# Altium PCB Pannel3.5x3.PcbDoc (part 2 of 4)
Units mil, origin at the board's own origin, x right, y up, seen from the top; angles counter-clockwise.
Board outline 3543.31 x 2771.65 mil, 4 copper layers (SIGNAL, GROUND, PWR, SIGNAL (Bottom)), stack 61.627 mil thick; 248 components, 189 nets, 921 pads, 651 vias.
Unrouted connection lines stored in the file: 1.
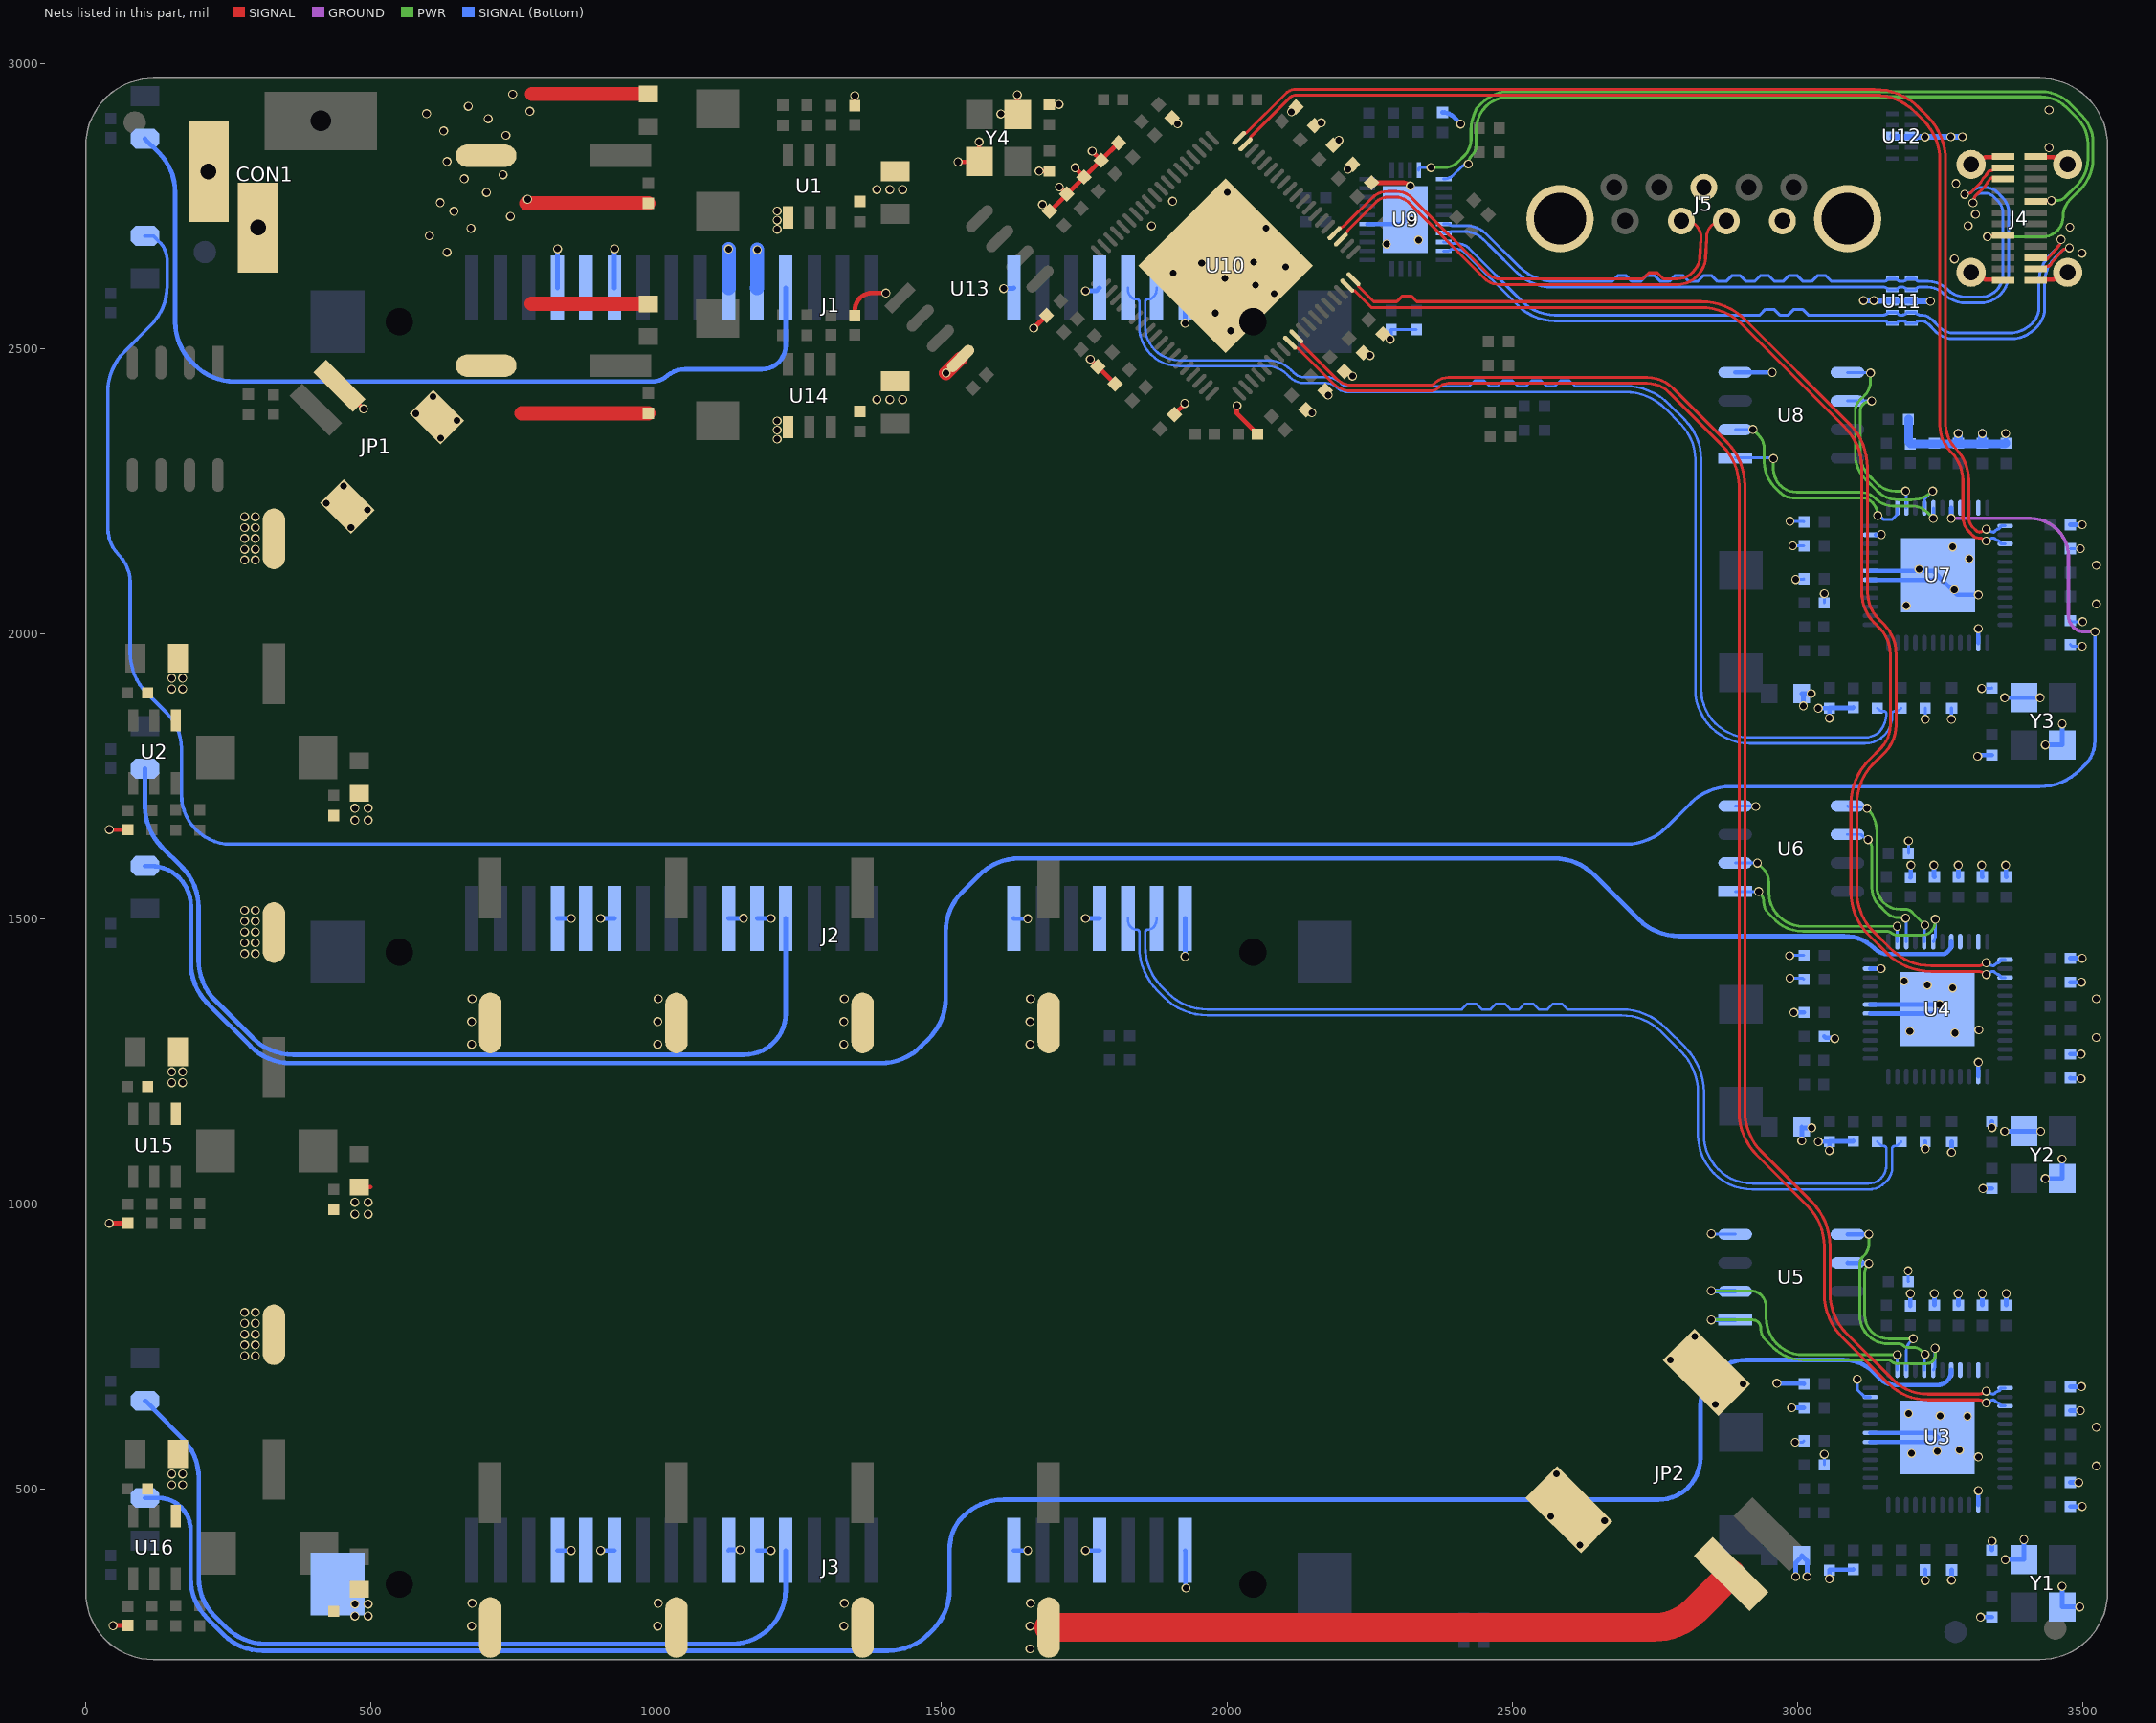
[diagram p4: the nets of this part, all layers, seen from the top]

## Via types
v1: diameter 15.75, hole 11.81, SIGNAL to SIGNAL (Bottom), tented both sides, 651 vias

## Nets (pads, with @x,y where several pads share a name; then routed paths per layer and width w, separated by ;. In a path a pad name is that pad's centre, name@x,y a point inside that pad or via, vN(x,y) a via of type N, cw(c..) or ccw(c..) an arc to the next point about the centre after c; other vN are vias at no path point) (continued)
cap_TX2_N: C22.1 J2.S3 | length 1723.4
  SIGNAL (Bottom) w4.29: J2.S3@1826.82,1500.84 1826.82,1498.42 ccw(c1845.58,1498.42) 1832.31,1485.15 ccw(c1842.38,1495.22) 1842.38,1480.98 cw(c1842.38,1476.69) 1845.42,1479.73 cw(c1842.38,1476.69) 1846.67,1476.69 1846.67,1451.41 ccw(c1956.85,1451.41) 1878.9,1373.55 ccw(c1956.85,1451.41) 1878.94,1373.5 1889.77,1362.67 ccw(c1966.24,1439.14) 1889.89,1362.56 ccw(c1966.24,1439.14) 1966.09,1331 ccw(c1966.24,1439.14) 1966.24,1331 2691.02,1331 cw(c2691.02,1231) 2761.73,1301.71 2796.57,1266.86 cw(c2725.86,1196.15) 2825.86,1196.15 2825.86,1121.5 ccw(c2921.53,1121.5) 2853.88,1053.86 2853.99,1053.75 ccw(c2921.65,1121.41) 2854.1,1053.64 ccw(c2921.65,1121.41) 2921.51,1025.72 ccw(c2921.65,1121.41) 2921.65,1025.72 3124.26,1025.72 ccw(c3124.26,1067.47) 3153.79,1037.95 3156.87,1041.03 ccw(c3134.46,1063.43) 3166.15,1063.43 3166.15,1097.58 cw(c3170.44,1097.58) 3167.4,1100.61 cw(c3170.44,1097.58) 3170.44,1101.87 3171.48,1101.87 ccw(c3171.48,1108.68) 3176.29,1103.86 C22.1@3182,1109.57
cap_TX2_P: C19.1 J2.S2 | length 1723.7
  SIGNAL (Bottom) w4.29: J2.S2@1876.82,1500.84 1876.82,1498.42 cw(c1858.06,1498.42) 1871.32,1485.15 cw(c1861.25,1495.22) 1861.25,1480.98 ccw(c1861.25,1476.69) 1858.22,1479.73 ccw(c1861.25,1476.69) 1856.96,1476.69 1856.96,1451.46 ccw(c1956.96,1451.46) 1886.25,1380.75 1897,1370 ccw(c1966.31,1439.31) 1966.31,1341.29 2388,1341.29 2412,1341.29 2422,1351.29 2437,1351.29 2447,1341.29 2462,1341.29 2472,1351.29 2487,1351.29 2497,1341.29 2512,1341.29 2522,1351.29 2537,1351.29 2547,1341.29 2562,1341.29 2572,1351.29 2587,1351.29 2597,1341.29 2612,1341.29 2691.06,1341.29 cw(c2691.06,1231.11) 2768.95,1309.04 ; 2768.97,1309.02 2803.88,1274.11 cw(c2725.97,1196.2) 2836.15,1196.2 2836.15,1121.58 ccw(c2921.72,1121.58) 2861.21,1061.08 ccw(c2921.72,1121.58) 2861.25,1061.04 ccw(c2921.72,1121.58) 2921.72,1036.01 3124.17,1036.01 ccw(c3124.17,1067.7) 3146.58,1045.29 ccw(c3124.17,1067.7) 3155.86,1067.7 3155.86,1097.58 ccw(c3151.56,1097.58) 3154.6,1100.61 ccw(c3151.57,1097.58) 3151.57,1101.87 3150.52,1101.87 cw(c3150.52,1108.68) 3145.71,1103.86 C19.1@3140,1109.57
cap_TX3_N: C21.1 J1.S3 | length 2021.5
  SIGNAL (Bottom) w4.29: J1.S3@1826.82,2606.09 1826.82,2602.74 ccw(c1843.32,2602.74) 1831.65,2591.07 1833.77,2588.95 ccw(c1840.32,2595.5) 1840.32,2586.24 1842.38,2586.24 cw(c1842.38,2581.95) 1845.42,2584.98 cw(c1842.38,2581.95) 1846.67,2581.95 1846.67,2538.55 ccw(c1916.14,2538.55) 1867,2489.45 1867.12,2489.33 ccw(c1916.19,2538.39) 1867.16,2489.28 ccw(c1916.19,2538.39) 1916.19,2469 2070.24,2469 cw(c2070.24,2418.37) 2106.04,2454.17 2110.15,2450.06 ; 2110.18,2450.03 ccw(c2136.02,2475.93) 2136.02,2439.34 2173.89,2439.34 cw(c2173.89,2412.66) 2192.75,2431.52 ; 2192.75,2431.53 ccw(c2211.62,2450.39) 2211.62,2423.71 2697.87,2423.71 cw(c2697.87,2323.71) 2768.58,2394.42 2794.79,2368.21 cw(c2731.51,2304.93) 2821,2304.93 2821,1902.78 ccw(c2915.96,1902.78) 2848.8,1835.65 2848.92,1835.52 ; 2848.94,1835.51 ccw(c2916.07,1902.67) 2916.07,1807.71 3118.35,1807.71 ccw(c3118.35,1855.43) 3152.09,1821.69 ccw(c3118.17,1855.61) 3166.15,1855.61 3166.15,1859.67 cw(c3170.44,1859.67) 3167.4,1862.7 cw(c3170.44,1859.67) 3170.44,1863.96 3172.53,1863.96 ccw(c3172.53,1873.3) C21.1@3179.12,1866.69 ; C21.1@3179.13,1866.69 C21.1@3182,1869.57
cap_TX3_P: C18.1 J1.S2 | length 2024.2
  SIGNAL (Bottom) w4.29: J1.S2@1876.82,2606.09 1876.82,2602.74 cw(c1860.32,2602.74) 1871.98,2591.07 1869.87,2588.95 cw(c1863.31,2595.5) 1863.31,2586.24 1861.25,2586.24 ccw(c1861.25,2581.95) 1858.22,2584.98 ccw(c1861.25,2581.95) 1856.96,2581.95 1856.96,2538.61 ccw(c1916.28,2538.61) 1874.34,2496.66 ccw(c1916.28,2538.61) 1916.28,2479.29 2070.38,2479.29 cw(c2070.38,2418.72) 2113.21,2461.55 2117.34,2457.42 ccw(c2136.15,2476.23) 2117.41,2457.35 ccw(c2136.15,2476.23) 2136.07,2449.63 ccw(c2136.15,2476.23) 2136.15,2449.63 2174,2449.63 cw(c2174,2412.93) 2199.95,2438.88 ; 2199.96,2438.87 ccw(c2211.73,2450.67) 2211.73,2434 2388,2434 2425,2434 2435,2444 2450,2444 2460,2434 2475,2434 2485,2444 2500,2444 2510,2434 2525,2434 2535,2444 2550,2444 2560,2434 2575,2434 2585,2444 2600,2444 2610,2434 2625,2434 2697.91,2434 cw(c2697.91,2323.82) 2775.8,2401.75 2802.19,2375.36 cw(c2731.95,2305.12) 2831.29,2305.12 2831.29,1902.86 ccw(c2916.15,1902.86) 2856.15,1842.86 ccw(c2916.15,1902.86) 2916.15,1818 3118.3,1818 ccw(c3118.3,1855.56) 3143.45,1827.67 ; C18.1@3140,1869.57 C18.1@3142.87,1866.69 ; 3141.84,1825.99 3141.95,1826.09 ccw(c3108.37,1859.67) 3143.45,1827.67 ; C18.1@3142.88,1866.69 ccw(c3149.47,1873.3) 3149.47,1863.96 3151.57,1863.96 cw(c3151.57,1859.67) 3154.6,1862.7 cw(c3151.56,1859.67) 3155.86,1859.67 cw(c3108.37,1859.67) 3155.83,1858.06 cw(c3108.37,1859.67) 3143.45,1827.67
DAS1: J3.P11
DAS2: J2.P11
DAS3: J1.P11
GND: C1.2 C2.2 C5.1 C6.1 C7.1 C8.1 C11.2 C13.2 C15.2 C16.2 C30.1 C31.1 C32.1 C33.1 C34.1 C35.1 C38.1 C39.1 C40.1 C41.1 C42.1 C43.1 C44.1 C45.1 C46.1 C47.1 C48.1 C49.1 C50.1 C51.1 C52.1 C53.1 C54.1 C55.1 C56.1 C57.1 C58.1 C59.1 C60.1 C61.1 C62.1 C63.1 C64.1 C65.1 C70.2 C71.2 C72.2 C73.2 C74.1 C75.1 C76.1 C78.1 C79.1 C80.1 C81.1 C82.1 C83.1 C84.1 C85.1 C86.1 C87.1 C88.1 C89.1 C90.1 C91.1 C94.2 C95.2 C96.1 C97.2 C108.2 C109.2 C110.1 C111.1 C112.1 C113.1 C114.1 C115.1 C116.1 C117.1 C118.1 C119.1 C120.1 C121.1 C122.1 C123.1 C124.1 C125.1 C126.1 C129.1 C130.1 C131.1 C132.1 C135.2 C137.2 C139.2 C141.1 C142.1 C144.2 CON1.2 CON1.3 E1.2 E2.2 E3.2 E4.2 E5.2 E6.2 E7.2 E8.2 E9.2 E10.2 E11.2 E12.2 E13.2 J1.P5 J1.P6 J1.P10 J1.P12 J1.S1 J1.S4 J1.S7 J2.P5 J2.P6 J2.P10 J2.P12 J2.S1 J2.S4 J2.S7 J3.P5 J3.P6 J3.P10 J3.P12 J3.S1 J3.S4 J3.S7 J3.SH2 J4.A1 J4.A12 J4.B1 J4.B12 J4.SH1 J4.SH2 J4.SH3 J4.SH4 J5.4 J5.7 J5.10 J5.11 JP1.0 JP1.2 JP2.0 JP2.2 R3.2 R4.2 R7.2 R9.2 R12.2 R30.1 R31.1 R32.1 R33.1 R36.1 R37.1 R44.2 R46.1 R47.1 R49.2 R53.2 U1.1 U2.1 U3.26 U3.42 U3.43 U3.47 U3.49 U4.26 U4.42 U4.43 U4.47 U4.49 U5.4 U6.4 U7.26 U7.42 U7.43 U7.47 U7.49 U8.4 U9.19 U9.29 U10.77 U11.3 U11.8 U12.3 U12.8 U13.4 U14.1 U15.1 U16.1 Y1.2 Y1.4 Y2.2 Y2.4 Y3.2 Y3.4 Y4.2 Y4.4 | length 7748.5
  SIGNAL w8: v1(41.46,966.54) R9.2@74,966.54 ; v1(41.54,1656.54) R4.2@74,1656.54 ; v1(48,261) 48.27,261.27 73.73,261.27 R12.2@74,261.54 ; JP1.2@445.13,2434.63 446.37,2434.63 v1(487,2394) ; C137.2@480,1030 498.94,1030 ; R7.2@1348,2557.46 1348,2566.72 cw(c1378.39,2566.72) 1356.9,2588.21 ; R3.2@1348,2925.46 v1(1348,2943.05) ; 1356.93,2588.23 cw(c1378.39,2566.72) 1378.39,2597.11 v1(1402.5,2597.11) ; v1(1529,2827) 1565.87,2827 Y4.2@1566.54,2827.66 1566,2828.2 v1(1566,2862) ; v1(1604.03,2911) 1632.8,2911 Y4.4@1632.89,2910.92 ; v1(1632.89,2944.67) Y4.4@1632.89,2910.92 ; Y4.4@1633.46,2910.34 Y4.4@1632.89,2910.92 ; v1(1661.48,2535.59) v1(1661.48,2535.59) C112.1@1683.95,2557.95 C112.1@1683.95,2557.95 ; v1(1670.96,2811) C109.2@1689,2811 ; v1(1676.8,2752.18) 1677.31,2752.18 1688.96,2740.53 C116.1@1689.47,2740.53 ccw(c1689.47,2742.94) 1691.18,2741.24 C125.1@1749.97,2800.03 ; C108.2@1689,2927.72 v1(1705.9,2927.72) ccw(c1705.9,2932.1) v1@1709,2929 ; v1(1706.48,2783.05) 1706.72,2783.05 1719.24,2770.53 C115.1@1719.47,2770.53 ; v1(1734.23,2816.61) 1734.23,2816.19 1749.46,2800.96 1749.46,2800.03 C125.1@1749.97,2800.03 ; v1(1760.72,2481.17) C120.1@1773.95,2467.95 C97.2@1803.95,2437.95 ; v1(1764.03,2845.8) 1764.11,2845.8 1779.88,2830.03 R49.2@1779.97,2830.03 ; C114.1@1810.47,2860.53 R49.2@1779.97,2830.03 ; R53.2@1903.83,2904.17 v1(1914,2894) ; C110.1@1908,2384 1908,2384.75 1926.25,2403 v1(1926.25,2403.75) ; v1(2017.72,2399.71) 2017.72,2386.01 R44.2@2053.73,2350 ; v1(2113.49,2914.99) 2113.49,2915.24 2121.53,2923.28 C118.1@2121.53,2923.53 ; C121.1@2138.53,2392.47 2141.88,2392.47 2146.93,2387.43 v1(2149.02,2387.43) ; C119.1@2153.53,2890.53 2158.37,2890.53 2163.42,2895.57 v1(2165.52,2895.57) ; C126.1@2172.53,2426.47 2172.53,2423.3 v1(2177.56,2418.26) ; C123.1@2186.53,2856.53 2187.16,2856.53 2195.67,2865.04 v1(2196.31,2865.04) ; C117.1@2205.53,2459.47 2210.25,2459.47 2218.3,2451.42 v1(2220.4,2451.42) ; v1@2212.24,2813.24 v1(2212.24,2814.24) C122.1@2220.53,2822.53 ; C124.1@2239.53,2492.47 2243.88,2492.47 2248.92,2487.43 v1(2251.02,2487.43) ; C113.1@2253.53,2790.53 2308.33,2790.53 cw(c2308.33,2771.54) 2315.51,2789.12 cw(c2308.33,2771.54) v1(2321.76,2784.97) ; J4.SH2@3304.36,2633.51 3316.04,2633.51 3328.97,2620.58 3359.81,2620.58 J4.B1@3360.66,2619.73 ; J4.SH1@3304.36,2822.49 3316.04,2822.49 3328.97,2835.42 3359.81,2835.42 J4.B12@3360.66,2836.27 ; J4.A12@3417.35,2619.73 3418.19,2620.58 3449.03,2620.58 3461.96,2633.51 J4.SH3@3473.65,2633.51 ; J4.A1@3417.35,2836.27 3418.19,2835.42 3449.03,2835.42 3461.96,2822.49 J4.SH4@3473.65,2822.49 ; C125.1@1749.97,2800.03 R49.2@1779.97,2830.03
  SIGNAL w25: 763.72,2386.28 C15.2@986,2386.28 ; v1@772.28,2754.28 C1.2@986,2754.28 ; 781.46,2578.09 C135.2@986,2578.09 ; 782.09,2946.09 C11.2@986,2946.09 ; v1(1508,2456.93) U13.4@1533.44,2482.37
  SIGNAL w50: E5.2@1688,257.89 2748.8,257.89 ccw(c2748.8,357.89) 2819.51,287.18 JP2.2@2883.87,351.54
  SIGNAL (Bottom) w5: U6.4@2890.97,1698 2891.47,1697.5 2926.5,1697.5 v1(2927,1697) ; v1(2986.41,1435.48) 2986.93,1436 C62.1@3011.57,1436 ; v1(2987,1396) 3009.57,1396 C60.1@3011.57,1394
  SIGNAL (Bottom) w5.1: v1(2286.12,2516.05) ccw(c2281.58,2520.59) 2288,2520.59 R46.1@2288,2533.27 R47.1@2332,2533.27 ; v1(2849,948) 2849.5,947.5 2890.47,947.5 U5.4@2890.97,947 ; v1(2987,2197) 3010.57,2197 C89.1@3011.57,2196 ; v1(2992,2154) C86.1@3011.57,2154 ; v1(2996.24,582.67) 3009.24,582.67 C43.1@3011.57,585 ; v1(2997,2095) 3010.57,2095 C85.1@3011.57,2096 ; C30.1@3047,543 v1(3047,561.28) ; C74.1@3047,2054 v1(3047,2070) ; v1(3105,693) 3105,674.91 3118.05,661.87 U3.47@3127.89,661.87 ; v1(3194,883) 3194,864.72 C58.1@3194.72,864 ; C63.1@3194.72,1615 v1(3194.72,1636.72) ; v1(3224,1850) C78.1@3224,1869.57 ; v1(3270,1850) 3270,1869.34 C83.1@3270.22,1869.57 ; v1(3323,1904) 3340.28,1904 C94.2@3341,1904.72 ; C81.1@3478.27,1981 3481.27,1978 v1(3499,1978) ; C84.1@3478.27,2023 3480.27,2021 v1(3500,2021) ; C82.1@3478.27,2149 v1(3496,2149)
  SIGNAL (Bottom) w8: J3.P12@826.82,392.86 v1(851.13,392.86) ; J2.P12@826.82,1500.84 v1(851.13,1500.84) ; J1.P12@826.82,2606.09 826.82,2674.11 v1(827.23,2674.52) ; v1(902.5,392.86) J3.P10@926.82,392.86 ; v1(902.5,1500.84) J2.P10@926.82,1500.84 ; J1.P10@926.82,2606.09 926.82,2674.11 v1(927.23,2674.52) ; J3.P6@1126.82,392.86 1127.96,394 v1(1147,394) ; J2.P6@1126.82,1500.84 1126.98,1501 v1(1153,1501) ; J3.P5@1176.82,392.86 v1(1201.13,392.86) ; J2.P5@1176.82,1500.84 v1(1201.13,1500.84) ; v1(1609,2605) 1625.72,2605 J1.S7@1626.82,2606.09 ; J3.S7@1626.82,392.86 v1(1651.13,392.86) ; J2.S7@1626.82,1500.84 1627.41,1500.25 v1(1651.13,1500.25) ; v1(1752.5,392.86) J3.S4@1776.82,392.86 ; v1(1752.5,1500.84) J2.S4@1776.82,1500.84 ; v1(1752.5,2600.85) 1771.58,2600.85 J1.S4@1776.82,2606.09 ; J3.S1@1926.82,392.86 1927.64,392.03 1927.64,327.69 v1(1928.47,326.86) ; v1(1926.82,1434.18) J2.S1@1926.82,1500.84 ; v1(1926.82,2544.18) J1.S1@1926.82,2606.09 ; U9.19@2246.07,2718.13 2305.13,2718.13 U9.29@2313,2726 ; C96.1@2378,2913.84 cw(c2378,2886.11) 2393.27,2909.26 cw(c2378,2886.11) 2397.61,2905.72 v1(2409.86,2893.48) ; U8.4@2890.97,2458 v1(2956,2458) ; v1(2964,686) 2964.5,685.5 3011.07,685.5 C56.1@3011.57,685 ; v1(2990,643) C54.1@3011.57,643 ; v1(2994,1336) C51.1@3011.57,1336 ; v1(2997,347) 2997,371.27 C32.1@3005.82,380.09 ; C32.1@3007.54,384 3017,374.54 v1(3017,347) ; C34.1@3007.54,1135 C34.1@3007.71,1134.84 ; v1(3007.71,1110.97) C34.1@3007.71,1134.84 ; v1(3010.42,1873.46) 3010.42,1892.12 C75.1@3007.54,1895 v1(3024.23,1895) ; v1@3027.71,1133.71 v1(3024.93,1133.71) 3008.84,1133.71 C34.1@3007.71,1134.84 ; v1(3036.57,1109.57) C35.1@3056,1109.57 ; v1(3036.81,1869.07) 3037.06,1869.32 3055.75,1869.32 C76.1@3056,1869.57 ; C31.1@3047,1294 3049.52,1291.48 3064.08,1291.48 v1(3065.57,1290) ; v1(3056,343) C33.1@3056,358.28 3056.7,358.98 3097.3,358.98 R32.1@3098,359.68 ; v1(3056,1094) C35.1@3056,1109.57 ; v1(3056,1852) C76.1@3056,1869.57 ; R33.1@3098,1110.68 3097.44,1110.12 3056.56,1110.12 C35.1@3056,1109.57 ; R37.1@3098,1870.68 3096.89,1869.57 C76.1@3056,1869.57 ; U3.42@3127.89,583.13 3238.13,583.13 U3.49@3246,591 3238.13,598.87 U3.43@3127.89,598.87 ; U4.42@3127.89,1334.13 3238.13,1334.13 U4.49@3246,1342 3238.13,1349.87 U4.43@3127.89,1349.87 ; U4.47@3127.89,1412.87 3127.95,1412.8 3146.27,1412.8 v1(3146.38,1412.69) ; U7.42@3127.89,2094.13 3238.13,2094.13 U7.49@3246,2102 ; U7.43@3127.89,2109.87 3238.13,2109.87 U7.49@3246,2102 ; U7.47@3137.78,2173.31 3146.61,2173.31 v1(3147.06,2173.75) ; R30.1@3198,821.61 v1(3198,843) ; R31.1@3198,1572.61 3198.5,1573.11 3198.5,1593.5 v1(3199,1594) ; v1(3224,340) C42.1@3224,358.57 ; v1(3224,1097) C48.1@3224,1109.57 ; v1(3239,1594) 3239.5,1593.5 3239.5,1574.22 C53.1@3240,1573.72 ; C45.1@3240,822.72 v1(3240,843) ; v1(3270.22,340.78) C41.1@3270.22,358.57 ; v1(3270.22,1090.78) C49.1@3270.22,1109.57 ; C59.1@3282,822.72 v1(3282,843) ; C65.1@3282,1573.72 v1(3282,1594) ; v1(3316,1785) cw(c3321.51,1779.49) 3321.51,1787.28 C95.2@3341,1787.28 ; U7.26@3316.87,1983.89 3316.93,1983.95 3316.93,2008.56 v1(3317.05,2008.68) ; U3.26@3316.93,472.95 v1@3316.93,497.56 ; U4.26@3316.93,1223.95 v1@3316.93,1248.56 ; v1(3317,2068) 3280,2068 U7.49@3246,2102 ; v1(3321,276) 3321.14,276.14 3340.86,276.14 C71.2@3341,276.28 ; v1(3323,1594) 3323.5,1593.5 3323.5,1574.22 C50.1@3324,1573.72 ; C40.1@3324,822.72 v1(3324,843) ; v1(3325.28,1027.28) C73.2@3341,1027.28 ; C70.2@3341,393.72 v1(3341,409) ; v1(3341,1134) C72.2@3341,1144.72 ; v1(3363.32,1127.68) Y2.4@3397,1127.68 v1(3426.43,1127.68) ; v1(3363.32,1887.68) Y3.4@3397,1887.68 v1(3425.32,1887.68) ; v1(3364.32,376.68) Y1.4@3397,376.68 v1(3397,412) ; v1(3365,1594) 3365.5,1593.5 3365.5,1574.22 C61.1@3366,1573.72 ; v1(3365,2351) 3365.5,2350.5 C87.1@3365.5,2334.22 ; C55.1@3366,822.72 v1(3366,843) ; v1@3429.52,1043.52 3433.01,1043.52 v1(3434.5,1045) Y2.2@3463.93,1045 v1(3463.93,1079.07) ; v1@3433,1805 v1(3434.5,1805) Y3.2@3463.93,1805 3464.02,1805.09 v1(3464.02,1842) ; v1(3463.93,330.07) Y1.2@3463.93,294 v1(3495,294) ; C39.1@3478.27,470 v1(3499,470) ; C38.1@3478.27,512 v1(3493,512) ; C44.1@3478.27,638 v1(3496,638) ; C57.1@3478.27,680 v1(3498,680) ; C47.1@3478.27,1221 3478.77,1220.5 3496.5,1220.5 v1(3497,1220) ; C46.1@3478.27,1263 v1(3497,1263) ; C52.1@3478.27,1389 v1(3498,1389) ; C64.1@3478.27,1431 v1(3499,1431) ; C88.1@3478.27,2191 v1(3499,2191)
  SIGNAL (Bottom) w10: v1(3116,2584) v1(3134,2584) 3134.5,2583.5 3166.06,2583.5 U11.8@3166.56,2583 U11.3@3199.44,2583 3199.53,2582.9 3233,2582.9 v1(3233.1,2582.81) ; U12.8@3166.56,2872 3167.19,2871.37 3222.91,2871.37 v1(3223.54,2870.75) 3223.67,2870.87 3268.87,2870.87 v1(3269,2871) v1(3289,2871)
  SIGNAL (Bottom) w15: C90.1@3194.72,2376 3194.72,2340.53 ccw(c3205.93,2340.53) R36.1@3198,2332.61 3361.61,2332.61 ccw(c3361.61,2338.11) C87.1@3365.5,2334.22 ; C91.1@3282,2333.72 v1(3282,2351) ; C80.1@3324,2333.72 v1(3324,2351)
  SIGNAL (Bottom) w25: J1.P6@1126.82,2606.09 v1(1126.82,2674.18) ; J1.P5@1176.82,2606.09 1177,2606.28 v1(1177,2673)
  other v1: 1655,220.33 676.41,260.33 1002.61,260.33 1328.8,260.33 1655,260.33 472,278 495,278 472,299 495,299 677.41,300.33 1003.61,300.33 1329.8,300.33 1656,300.33 2619,402 2662,445 2568,453 3317.05,497.68 151,508 170,508 151,527 170,527 2578,527 3524,541 3317,557 3200,563 3245.1,566.95 3284,569 3524,609 3298,628 3250,629 3195,633 2856,649 2905,685 2777,727 278.55,733.99 297.55,733.99 278.55,752.99 297.55,752.99 2820,768 278.55,771.99 297.55,771.99 278.55,790.99 297.55,790.99 278.55,809.99 297.55,809.99 472,982.28 495,982.28 472,1003.28 495,1003.28 151,1213 170,1213 151,1232 170,1232 3317.05,1248.68 676.41,1280 1002.61,1280 1328.8,1280 1655,1280 3524,1292 3276,1300 3197,1303 3317.97,1305.53 676.41,1320 1002.61,1320 1328.8,1320 1655,1320 3249,1350 677.41,1360 1003.61,1360 1329.8,1360 1656,1360 3524,1360 3272,1379 3228,1384 3187,1391 278.55,1438.99 297.55,1438.99 278.55,1457.99 297.55,1457.99 278.55,1476.99 297.55,1476.99 278.55,1495.99 297.55,1495.99 278.55,1514.99 297.55,1514.99 472,1673 495,1673 472,1694 495,1694 151,1903 170,1903 151,1922 170,1922 3191,2049 3524,2052 3275,2077 3213,2113 3524,2120 278.55,2128.99 297.55,2128.99 3301.17,2131.07 278.55,2147.99 297.55,2147.99 3272,2152 278.55,2166.99 297.55,2166.99 278.55,2185.99 297.55,2185.99 465,2186 278.55,2204.99 297.55,2204.99 494,2217 422,2229 452,2259 1212,2341 621.9,2342.9 1212,2357 1212,2373 650.9,2373.9 578.9,2385.9 1386.91,2410.4 1409.31,2410.4 1431.84,2410.4 608.9,2415.9 2007,2531 1980,2562 2083,2596 2050,2611 1997,2623 1906,2632 2103,2643 1956,2650 2047,2651.63 3275.09,2657 3498.81,2667 633.45,2668.55 2280,2683 2336,2690 602.45,2697.55 1212,2709 675.45,2710.55 2069,2711 3477.51,2712.55 1867.95,2714.87 3299,2715 2324,2724 1212,2725 744.55,2731.55 3312.21,2735.08 645.45,2740.55 1212,2741 621.45,2755.55 1905.04,2758.01 774.55,2761.55 702.55,2773.55 2001,2774 1386.91,2778.4 1409.31,2778.4 1431.84,2778.4 3278,2789 663.45,2797.55 731.55,2804.55 633.45,2827.55 3441,2852 736.45,2873.55 627.55,2881.45 705.45,2902.55 597.55,2911.45 778.45,2915.55 3441,2918 670.55,2924.45 748.45,2945.55
GPIO0-A: U3.2 U5.2 | length 467.6
  PWR w5: v1(2849,848) 2917.69,848 cw(c2917.69,820.69) 2936.99,840.01 cw(c2917.69,820.69) 2945,820.69 2945,801 ccw(c3010.19,801) 2964.09,754.91 ccw(c3010.19,801) 3010.19,735.81 v1(3174.95,735.81)
  SIGNAL (Bottom) w5: v1(3174.95,735.81) 3174.95,709.3 U3.2@3175.13,709.11
  SIGNAL (Bottom) w8: v1(2849,848) 2849.5,847.5 2890.47,847.5 U5.2@2890.97,847
GPIO0-B: U4.2 U6.2 | length 383
  PWR w5: v1(2930,1598) 2940,1588 cw(c2915.86,1563.86) 2950,1563.86 2950,1546.75 ccw(c3009.75,1546.75) 2967.47,1504.53 ; 2967.53,1504.47 ccw(c3009.75,1546.75) 3009.75,1487 v1(3174.76,1487)
  SIGNAL (Bottom) w5: U6.2@2890.97,1598 v1(2930,1598) ; v1(3174.76,1487) 3174.95,1486.81 3174.95,1460.3 U4.2@3175.13,1460.11
GPIO0-C: U7.2 U8.2 | length 400.9
  PWR w5: v1(2922,2358) 2932,2348 cw(c2907.86,2323.86) 2942,2323.86 2942,2301.16 ccw(c3005.16,2301.16) 2960.5,2256.5 2969.75,2247.25 ccw(c2992.08,2269.58) 2992.08,2238 3112.31,2238 cw(c3112.31,2211.54) 3131.02,2230.25 3131.41,2229.87 cw(c3108.67,2207.13) 3138.77,2218.43 cw(c3108.67,2207.13) v1(3140.83,2207.13)
  SIGNAL (Bottom) w5: U8.2@2890.97,2358 v1(2922,2358) ; v1(3140.83,2207.13) 3143.73,2207.13 3151.03,2199.83 3165.47,2199.83 3175.13,2209.49 U7.2@3175.13,2220.11
GPIO1-A: U3.3 U5.6 | length 297.8
  PWR w5: v1(3125,896) ccw(c3141.9,879.1) 3121,890.7 ccw(c3141.9,879.1) 3118,879.1 3118,805.58 ccw(c3159.58,805.58) 3130.18,776.18 ccw(c3159.58,805.58) 3159.58,764 v1(3203.14,764)
  SIGNAL (Bottom) w5: U3.3@3190.88,709.11 3190.88,743.08 cw(c3211.8,743.08) 3197.01,757.87 v1(3203.14,764)
  SIGNAL (Bottom) w8: U5.6@3087.82,897 3088.32,896.5 3124.5,896.5 v1(3125,896)
GPIO1-B: U4.3 U6.6 | length 256.5
  PWR w5: v1(3124,1639) cw(c3108.61,1623.61) 3128.4,1632.67 cw(c3108.61,1623.61) 3130.37,1623.61 3130.37,1554.82 ccw(c3174.3,1554.82) 3143.24,1523.76 3156.11,1510.89 ; 3156.13,1510.87 ccw(c3176.67,1531.46) 3176.67,1502.37 3188.72,1502.37 v1(3189.76,1501.34)
  SIGNAL (Bottom) w5: U6.6@3087.82,1648 3111.48,1648 3118.42,1641.06 3121.94,1641.06 v1(3124,1639) ; v1(3189.76,1501.34) 3190.88,1500.21 U4.3@3190.88,1460.11
GPIO1-C: U7.3 U8.6 | length 292.9
  PWR w5: 3115.02,2402.03 ccw(c3126.13,2390.92) 3110.42,2390.92 3110.42,2312.97 ccw(c3160.3,2312.97) 3125.01,2277.72 ; 3115.03,2402.04 cw(c3129.42,2387.63) 3122.1,2406.64 cw(c3129.42,2387.63) 3129.42,2408 v1(3130,2408) ; 3125.03,2277.7 3139.64,2263.09 ccw(c3171.24,2294.7) 3171.24,2250 v1(3189.76,2250)
  SIGNAL (Bottom) w5: U8.6@3087.82,2408 v1(3130,2408) ; v1(3189.76,2250) 3190.33,2249.42 3190.33,2220.66 U7.3@3190.88,2220.11
GPIO2-A: U3.5 U5.5 | length 360.4
  PWR w5: 3114.11,906.86 ccw(c3125,896) 3109.64,896.56 3109.02,880.37 ccw(c3141.9,879.1) 3109,879.1 3109,805.58 ccw(c3159.58,805.58) 3123.81,769.81 ccw(c3159.58,805.58) 3159.58,755 3166.93,755 3167,755 3178.49,755 cw(c3178.49,744.12) 3186.19,751.81 ccw(c3193.88,759.51) 3193.88,748.63 3203.21,748.63 cw(c3203.21,728.27) 3217.6,742.67 v1(3223.57,736.7) ; 3114.15,906.89 3117.01,909.75 ccw(c3097.69,929.06) 3125,929.06 v1(3125,947)
  SIGNAL (Bottom) w5: U3.5@3222.38,709.11 3222.93,709.66 3222.93,736.06 v1(3223.57,736.7)
  SIGNAL (Bottom) w8: U5.5@3087.82,947 v1(3125,947)
GPIO2-B: U4.5 U6.5 | length 324.9
  PWR w5: v1(3122,1694) cw(c3080.06,1652.06) 3139.37,1652.06 3139.37,1557.07 ccw(c3179.73,1557.07) 3151.2,1528.53 3151.31,1528.42 ccw(c3179.57,1556.68) 3179.57,1516.71 3189.67,1516.71 cw(c3189.76,1501.34) 3189.87,1516.71 cw(c3189.76,1501.34) 3200.55,1512.28 cw(c3189.76,1501.34) 3200.7,1512.13 cw(c3189.76,1501.34) 3200.81,1512.02 3205.13,1507.6 3214.3,1498.2 v1(3223.5,1489)
  SIGNAL (Bottom) w5: U6.5@3087.82,1698 3089.82,1696 3120,1696 v1(3122,1694) ; U4.5@3222.38,1460.11 3222.93,1460.66 3222.93,1488.42 v1(3223.5,1489)
GPIO2-C: U7.5 U8.5 | length 410.6
  PWR w5: 3108.68,2408.42 ccw(c3126.13,2390.92) 3108.64,2408.38 ccw(c3126.13,2390.92) 3101.42,2390.92 3101.42,2312.97 ccw(c3160.3,2312.97) 3118.63,2271.37 ccw(c3160.3,2312.97) 3118.7,2271.3 3120.53,2269.47 3139.64,2250.36 ccw(c3177.63,2288.35) 3177.63,2234.63 3199.88,2234.63 ccw(c3199.88,2287.12) v1(3237,2250) ; 3108.7,2408.44 3109.54,2409.28 3117.66,2417.4 ccw(c3092.68,2442.37) 3128,2442.37 v1(3128,2457)
  SIGNAL (Bottom) w5: U8.5@3087.82,2458 3127,2458 v1(3128,2457) ; U7.5@3222.38,2220.11 3222.75,2220.48 3222.75,2235.75 v1(3237,2250)
GPIO3-A: U3.6 U5.1 | length 530.4
  PWR w5: v1(2849,797) 2921.83,797 cw(c2921.83,782.83) 2931.84,792.86 cw(c2921.83,782.83) 2936,782.83 2936,779.48 ccw(c2958.24,779.48) 2942.51,763.76 2957.73,748.54 ; 2957.76,748.52 ccw(c3010.19,801) 3009.96,726.81 3017.49,726.81 3020,726.81 3157.7,726.81 cw(c3157.7,715.93) 3165.39,723.63 3166.98,722.66 ccw(c3174.95,735.81) 3174.95,720.44 ccw(c3174.95,735.81) 3176.88,720.56 cw(c3177.58,715.61) 3177.63,720.61 3197.42,720.44 ; 3197.43,720.44 3226.28,720.44 ccw(c3226.28,735.92) 3237.22,724.96 ; 3237.25,724.99 ccw(c3226.28,735.92) 3241.77,735.92 3241.77,746.97 v1(3241.35,747.38)
  SIGNAL (Bottom) w5: U3.6@3238.13,709.11 ccw(c3230.33,716.9) 3241.35,716.9 v1(3241.35,747.38)
  SIGNAL (Bottom) w8: v1(2849,797) U5.1@2890.97,797
GPIO3-B: U4.6 U6.1 | length 445.9
  PWR w5: v1(2932,1548) v1@2933.67,1546.33 ; v1@2933.69,1546.31 cw(c2915.98,1528.64) 2941,1528.64 ccw(c2966.02,1528.64) 2948.33,1510.94 2961.14,1498.14 ccw(c3009.75,1546.75) 2961.18,1498.09 ccw(c3009.75,1546.75) 3009.75,1478 3157.51,1478 cw(c3157.51,1467.12) 3165.2,1474.81 3166.8,1473.85 ccw(c3174.76,1487) 3174.76,1471.63 ccw(c3174.76,1487) 3176.52,1471.73 cw(c3177.15,1466.77) 3177.19,1471.77 3193.52,1471.63 ; 3193.53,1471.63 3218.68,1471.63 ccw(c3218.68,1493.83) 3234.37,1478.13 ; 3234.39,1478.14 ccw(c3223.5,1489) 3235.39,1479.24 3235.51,1479.39 ccw(c3216.05,1495.78) 3240.21,1487.81 ccw(c3216.05,1495.78) 3241.49,1495.78 v1(3241.49,1499.34)
  SIGNAL (Bottom) w5: U6.1@2890.97,1548 v1(2932,1548) ; U4.6@3238.13,1460.11 ccw(c3230,1468.24) 3238.68,1460.7 ccw(c3230,1468.24) 3241.49,1468.24 v1(3241.49,1499.34)
GPIO3-C: U7.6 U8.1 | length 422
  PWR w5: v1(2958,2307) 2958,2288.51 ccw(c2998.51,2288.51) 2969.84,2259.89 ; 2969.86,2259.86 ccw(c2998.51,2288.51) 2998.51,2248 3109.03,2248 cw(c3109.03,2207.03) 3127.69,2243.51 3128.46,2243.11 cw(c3112.31,2211.54) 3137.37,2236.63 ; 3138,2236 ccw(c3166.97,2264.97) 3166.97,2224 3200.48,2224 cw(c3200.48,2186.35) 3227.08,2212.99 ; 3227.1,2212.97 v1(3238.13,2201.95)
  SIGNAL (Bottom) w5: U8.1@2890.97,2308 2890.97,2309.11 2892.07,2308 2957,2308 v1(2958,2307) ; v1(3238.13,2201.95) U7.6@3238.13,2220.11
GPIO4-A: LED4.2 U3.8 | length 3737.4
  SIGNAL (Bottom) w8: LED4.2@104,484.86 127.91,484.86 cw(c127.91,428.77) 167.54,468.46 cw(c127.91,428.77) 184,428.77 184,344.42 ccw(c284,344.42) 213.29,273.71 241.63,245.37 ccw(c310.05,313.79) 310.05,217.03 1406.61,217.03 ccw(c1406.61,317.03) 1477.32,246.32 1484.71,253.71 ccw(c1414,324.42) 1514,324.42 1514,393.23 cw(c1602.77,393.23) 1531.25,445.82 1538.15,452.71 cw(c1608.86,382) 1568.35,473.43 cw(c1608.86,382) 1608.86,482 2756.59,482 ccw(c2756.59,555.41) 2808.5,503.5 ccw(c2756.59,555.41) 2830,555.41 2830,646.77 cw(c2910.23,646.77) 2853.48,703.48 cw(c2910.23,646.77) 2910.23,727 3080.89,727 cw(c3080.89,651.89) 3134,705 3145,694 ; 3145.03,693.97 ccw(c3171.56,720.56) 3171.56,683 3245.41,683 ccw(c3245.41,707.21) 3262.53,690.09 ccw(c3245.41,707.21) 3269.62,707.21 U3.8@3269.62,709.11
GPIO4-B: LED6.2 U4.8 | length 3712.4
  SIGNAL (Bottom) w8: LED6.2@104,1592.84 113.96,1592.84 cw(c113.96,1522.32) 163.82,1572.18 cw(c113.96,1522.32) 184.47,1522.32 184.47,1422.63 ccw(c284.47,1422.63) 213.76,1351.92 289.39,1276.29 ccw(c360.1,1347) 360.1,1247 1393.26,1247 ccw(c1393.26,1347) 1463.97,1276.29 1477.99,1290.31 ccw(c1407.28,1361.02) 1507.28,1361.02 1507.28,1476.82 cw(c1607.28,1476.82) 1536.57,1547.53 1565.75,1576.71 cw(c1636.46,1506) 1636.46,1606 2573.58,1606 cw(c2573.58,1506) 2644.29,1576.71 2721.71,1499.29 ccw(c2792.42,1570) 2792.42,1470 3081.57,1470 cw(c3081.57,1393.57) 3135.61,1447.61 ; 3135.63,1447.6 ccw(c3158.03,1470.03) 3158.03,1438.33 3245,1438.33 3252.16,1438.39 cw(c3252.27,1430.4) 3252.88,1438.37 ccw(c3253.87,1450.27) 3253.87,1438.33 ccw(c3253.87,1450.27) 3262.29,1441.8 ccw(c3253.87,1450.27) 3262.34,1441.85 ; 3262.36,1441.88 3265.81,1445.32 ccw(c3256.6,1454.53) 3269.62,1454.53 U4.8@3269.62,1460.11
GPIO4-C: LED8.2 U7.8 | length 5174.2
  GROUND w6: v1(3269.62,2201.95) 3408.35,2201.95 cw(c3408.35,2135.3) 3455.48,2182.43 cw(c3408.35,2135.3) 3475,2135.3 3475,2031.75 ccw(c3503.36,2031.75) 3483.31,2011.69 ccw(c3503.36,2031.75) 3503.36,2003.39 v1(3521.54,2003.39)
  SIGNAL (Bottom) w6: 58.46,2137.54 cw(c105.63,2184.71) 38.92,2184.71 38.92,2423.7 cw(c138.92,2423.7) 68.21,2494.41 113.81,2540.01 ccw(c43.82,2610) 113.84,2540.04 ccw(c43.82,2610) 142.8,2610 142.8,2655.81 ccw(c101.3,2655.81) 130.65,2685.15 118.49,2697.3 LED8.2@104,2697.3 ; 58.48,2137.52 cw(c11.29,2090.37) 78,2090.37 78,1966.43 ccw(c178,1966.43) 107.29,1895.72 142.51,1860.51 cw(c80.96,1798.96) 168,1798.96 168,1717.63 ccw(c254.63,1717.63) 193.34,1656.41 ; 193.37,1656.37 ccw(c254.63,1717.63) 254.63,1631 2699.58,1631 ccw(c2699.58,1731) 2770.29,1660.29 2812.71,1702.71 cw(c2883.42,1632) 2883.42,1732 3424.58,1732 ccw(c3424.58,1832) 3495.29,1761.29 3504,1770 ccw(c3461.67,1812.33) 3521.54,1812.33 v1(3521.54,2003.39)
  SIGNAL (Bottom) w8: v1@3269.62,2200.38 v1(3269.62,2201.95) U7.8@3269.62,2220.11
GPIO5-A: U3.9
GPIO5-B: U4.9
GPIO5-C: U7.9
GPIO6-A: U3.11
GPIO6-B: U4.11
GPIO6-C: U7.11
HOT1: J3.P4 LED3.2 | length 1559.7
  SIGNAL (Bottom) w8: LED3.2@104.01,655.15 105.1,655.15 118.6,641.65 118.6,640.56 169.02,590.13 cw(c98.31,519.42) 198.31,519.42 198.31,344.79 ccw(c292.79,344.79) 225.99,277.99 245.65,258.32 ccw(c316.36,329.03) 316.36,229.03 1131.58,229.03 ccw(c1131.58,324.26) 1198.88,256.88 ; 1198.93,256.93 ccw(c1131.58,324.26) 1226.82,324.26 J3.P4@1226.82,392.86 ; 1198.88,256.88 ccw(c1131.58,324.26) 1198.92,256.92
HOT2: J2.P4 LED5.2 | length 1686.9
  SIGNAL (Bottom) w8: LED5.2@104.01,1763.13 104.01,1697.16 ccw(c204.01,1697.16) 133.29,1626.45 168.71,1591.04 cw(c98,1520.33) 198,1520.33 198,1427.42 ccw(c298,1427.42) 227.29,1356.71 292.71,1291.29 ccw(c363.42,1362) 363.42,1262 1154.75,1262 ccw(c1154.75,1334.06) 1205.71,1283.11 ccw(c1154.75,1334.06) 1226.82,1334.06 J2.P4@1226.82,1500.84
HOT3: J1.P4 LED7.2 | length 1597.6
  SIGNAL (Bottom) w8: LED7.2@104.01,2867.6 127.71,2843.9 cw(c57,2773.19) 157,2773.19 157,2546.42 ccw(c257,2546.42) 186.29,2475.71 190.71,2471.29 ccw(c261.42,2542) 261.42,2442 993.27,2442 ccw(c993.27,2480.06) 1020.16,2453.13 ; 1020.18,2453.15 1024.81,2456.06 cw(c1050.84,2414.74) 1050.84,2463.58 1185.45,2463.58 ccw(c1185.45,2504.95) 1214.68,2475.68 ccw(c1185.45,2504.95) 1226.82,2504.95 J1.P4@1226.82,2606.09
HSD1_N: U3.13 U10.10 | length 2795.5
  SIGNAL w5.1: U10.10@2121.89,2521.11 2129.37,2513.63 cw(c2125.99,2510.25) 2130.77,2510.25 ccw(c2135.55,2510.25) 2132.17,2506.87 2192.52,2446.52 ; 2192.54,2446.5 ccw(c2219.08,2473.08) 2219.08,2435.52 2355.63,2435.52 ccw(c2355.63,2448.43) 2364.75,2439.29 cw(c2388.18,2415.88) 2388.18,2449 2736.68,2449 cw(c2736.68,2384.78) 2782.09,2430.19 2875.72,2336.57 cw(c2798.09,2258.94) 2907.87,2258.94 2907.87,1162.55 ccw(c3007.87,1162.55) 2937.11,1091.89 ccw(c3007.87,1162.55) 2937.16,1091.84 3025.02,1003.98 cw(c2947.48,926.44) 3057.14,926.44 3057.14,843.56 ccw(c3157.14,843.56) 3086.43,772.85 3166.64,692.64 ; 3166.68,692.61 ccw(c3228.75,754.75) 3228.75,666.92 3318.15,666.92 ccw(c3318.15,678.14) v1@3326.07,670.19 ; v1@3326.08,670.2 cw(c3331,665.28) v1(3331,672.24)
  SIGNAL (Bottom) w5.1: v1(3331,672.24) cw(c3331,665.28) 3335.92,670.2 v1@3336.54,669.58 ; v1@3336.56,669.57 ccw(c3342.97,676) 3342.97,666.92 3343.53,666.92 3344.62,667.42 ccw(c3342.47,672.05) 3345.06,667.66 ccw(c3342.47,672.05) 3346.31,668.69 cw(c3354.27,661.87) 3352.02,672.11 ccw(c3350.88,677.08) 3355.79,675.7 3355.79,675.43 cw(c3357.98,675.43) 3356.43,676.97 cw(c3357.98,675.43) 3357.98,677.61 U3.13@3364.11,677.61
HSD1_P: U3.15 U10.9 | length 2803.4
  SIGNAL w5.1: U10.9@2110.78,2510.01 2118.27,2502.53 ccw(c2121.65,2505.91) 2121.65,2501.13 cw(c2121.65,2496.35) 2125.03,2499.73 2185.43,2439.33 ccw(c2219.01,2472.92) 2185.5,2439.26 ccw(c2219.01,2472.92) 2218.92,2425.42 ccw(c2219.01,2472.92) 2219.01,2425.42 2355.7,2425.42 ccw(c2355.7,2448.25) 2371.85,2432.1 cw(c2388.26,2415.7) 2388.26,2438.9 2736.61,2438.9 cw(c2736.61,2384.61) 2775,2423 2868.48,2329.52 cw(c2797.77,2258.81) 2897.77,2258.81 2897.77,1162.5 ccw(c3007.74,1162.5) 2929.92,1084.79 ccw(c3007.74,1162.5) 2929.98,1084.73 3017.75,996.96 cw(c2947.04,926.25) 3017.82,996.9 cw(c2947.04,926.25) 3047.04,926.25 3047.04,843.53 ccw(c3157.05,843.53) 3079.21,765.79 ccw(c3157.05,843.53) 3079.26,765.74 3091,754 3159.5,685.5 3159.56,685.44 ccw(c3228.67,754.56) 3228.67,656.82 3318.15,656.82 cw(c3318.15,645.6) v1@3326.07,653.54 ; v1@3326.08,653.53 ccw(c3331,658.45) v1(3331,651.49)
  SIGNAL (Bottom) w5.1: v1(3331,651.49) ccw(c3331,658.45) 3335.92,653.53 3336.54,654.15 cw(c3342.97,647.73) 3342.97,656.82 3343.71,656.63 cw(c3342.47,651.68) 3345.06,656.07 cw(c3342.47,651.68) 3346.3,655.05 ccw(c3354.27,661.87) 3351.99,651.63 cw(c3350.88,646.65) 3355.79,648.03 3355.79,648.31 ccw(c3357.98,648.31) 3356.43,646.76 ccw(c3357.98,648.31) 3357.98,646.12 U3.15@3364.11,646.12
HSD2_N: U4.13 U10.19 | length 2181.5
  SIGNAL w5.1: U10.19@2222.08,2621.31 2230.96,2612.43 2230.96,2608.47 2257.33,2582.1 2283,2582.1 2298,2582.1 2308,2592.1 2323,2592.1 2333,2582.1 2380,2582.1 2831.57,2582.1 cw(c2831.57,2472.44) 2909.12,2549.98 3090.63,2368.46 cw(c3013.01,2290.84) 3122.79,2290.84 3122.79,2073.09 ccw(c3190.09,2073.09) 3142.48,2025.52 3151.58,2016.42 cw(c3099.98,1964.81) 3172.96,1964.81 3172.96,1839.6 cw(c3105.54,1839.6) 3153.21,1791.93 3133.29,1772.01 ccw(c3204,1701.3) 3104,1701.3 3104,1548.42 ccw(c3204,1548.42) 3133.29,1477.71 3163.79,1447.21 ccw(c3234.51,1517.92) 3234.51,1417.92 3318.15,1417.92 ccw(c3318.15,1429.14) v1@3326.07,1421.19 ; v1@3326.08,1421.2 cw(c3331,1416.28) v1(3331,1423.24)
  SIGNAL (Bottom) w5.1: v1(3331,1423.24) cw(c3331,1416.28) 3335.92,1421.2 v1@3336.54,1420.58 ; v1@3336.56,1420.57 ccw(c3342.97,1427) 3342.97,1417.92 3343.53,1417.92 3344.62,1418.42 ccw(c3342.47,1423.05) 3345.06,1418.66 ccw(c3342.47,1423.05) 3346.31,1419.69 cw(c3354.27,1412.87) 3352.02,1423.11 ccw(c3350.88,1428.08) 3355.79,1426.7 3355.79,1426.43 cw(c3357.98,1426.43) 3356.43,1427.97 cw(c3357.98,1426.43) 3357.98,1428.61 U4.13@3364.11,1428.61
HSD2_P: U4.15 U10.18 | length 2181.6
  SIGNAL w5.1: U10.18@2210.98,2610.21 2219.86,2601.33 2223.82,2601.33 2253.15,2572 2831.39,2572 cw(c2831.39,2472) 2902.1,2542.71 3083.4,2361.42 cw(c3012.69,2290.71) 3112.69,2290.71 3112.69,2073.01 ccw(c3189.88,2073.01) 3135.24,2018.48 ccw(c3189.88,2073.01) 3135.3,2018.42 3144.33,2009.39 cw(c3099.6,1964.65) 3162.86,1964.65 3162.86,1839.72 cw(c3105.24,1839.72) 3146,1799 3126.11,1779.11 ccw(c3203.87,1701.35) 3093.9,1701.35 3093.9,1547.21 ccw(c3201.07,1547.21) 3125.25,1471.47 3156.68,1440.04 ccw(c3234.47,1517.83) 3234.47,1407.82 3318.15,1407.82 cw(c3318.15,1396.6) v1@3326.07,1404.54 ; v1@3326.08,1404.53 ccw(c3331,1409.45) v1(3331,1402.49)
  SIGNAL (Bottom) w5.1: v1(3331,1402.49) ccw(c3331,1409.45) 3335.92,1404.53 3336.54,1405.15 cw(c3342.97,1398.73) 3342.97,1407.82 3343.71,1407.63 cw(c3342.47,1402.68) 3345.06,1407.07 cw(c3342.47,1402.68) 3346.3,1406.05 ccw(c3354.27,1412.87) 3351.99,1402.63 cw(c3350.88,1397.65) 3355.79,1399.03 3355.79,1399.31 ccw(c3357.98,1399.31) 3356.43,1397.76 ccw(c3357.98,1399.31) 3357.98,1397.12 U4.15@3364.11,1397.12
HSD3_N: J5.2 U10.23 | length 844.2
  SIGNAL w5.1: U10.23@2188.71,2702.06 2197.06,2710.41 ccw(c2187.84,2736.91) 2207.68,2717.07 cw(c2234.65,2690.1) 2207.72,2717.12 2254.88,2764.27 cw(c2281.81,2737.26) 2281.81,2775.41 2297.39,2775.41 cw(c2297.39,2737.26) 2324.28,2764.32 2458.41,2630.18 ccw(c2478.21,2650.05) 2478.21,2622 2714.09,2622 2729.09,2622 2739.54,2632.46 2754.54,2632.46 2765,2622 2780,2622 2789.44,2622 ccw(c2789.44,2659.56) 2816,2633 ccw(c2779.91,2669.09) 2826.07,2647.32 ccw(c2800.89,2659.67) 2826.32,2647.83 2826.35,2647.9 ccw(c2800.89,2659.68) 2828.9,2658.11 2830.91,2693.88 ccw(c2802.9,2695.45) 2802.9,2723.5 J5.2@2796.6,2723.5
HSD3_P: J5.3 U10.22 | length 843.5
  SIGNAL w5.1: U10.22@2199.81,2690.96 2208.16,2699.31 cw(c2234.65,2690.1) 2214.82,2709.93 ; 2214.86,2709.97 2262.01,2757.13 cw(c2281.81,2737.26) 2281.81,2765.31 2297.39,2765.31 cw(c2297.39,2737.26) 2317.16,2757.15 2451.28,2623.03 ccw(c2478.21,2650.05) 2478.21,2611.9 2789.5,2611.9 ccw(c2789.5,2659.43) 2823.1,2625.82 2823.17,2625.88 ccw(c2780,2669.05) 2835.22,2643.01 2835.24,2643.07 2835.51,2643.66 ccw(c2800.89,2659.68) 2838.98,2657.54 2840.99,2693.26 ccw(c2802.9,2695.45) 2841.05,2695.45 cw(c2869.1,2695.45) 2869.1,2723.5 J5.3@2875.4,2723.5
HSD4_N: U7.13 U10.38 | length 2065.1
  SIGNAL w5.1: U10.38@2021.69,2869.08 2030.57,2877.96 2034.53,2877.96 2103.03,2946.46 ; 2103.05,2946.49 cw(c2121.46,2928.02) 2121.46,2954.1 3135.5,2954.1 cw(c3135.5,2844.44) 3213.04,2921.98 3227.51,2907.51 cw(c3149.89,2829.88) 3255.28,2860.6 cw(c3149.89,2829.88) 3259.67,2829.88 3259.67,2367.01 ccw(c3319.25,2367.01) 3277.12,2324.88 cw(c3221.42,2269.18) 3300.19,2269.18 3300.19,2204.65 ccw(c3326.92,2204.65) 3308,2185.77 3313.39,2180.37 ccw(c3319.32,2186.3) 3319.32,2177.92 ccw(c3319.32,2186.3) 3325.25,2180.37 3326.08,2181.2 cw(c3331,2176.28) v1(3331,2183.24)
  SIGNAL (Bottom) w5.1: v1(3331,2183.24) cw(c3331,2176.28) 3335.92,2181.2 3336.54,2180.58 ccw(c3342.97,2187) 3342.97,2177.92 3344.13,2177.92 3344.51,2178.29 3345.54,2179.15 ccw(c3342.28,2183.08) 3346.22,2179.84 cw(c3354.38,2173.24) 3352.13,2183.49 ccw(c3350.99,2188.46) 3355.9,2187.08 3355.9,2186.8 cw(c3358.09,2186.8) 3356.45,2188.25 cw(c3358.09,2186.8) 3356.54,2188.35 cw(c3358.09,2186.8) 3358.09,2188.99 U7.13@3364.22,2188.99
HSD4_P: U7.15 U10.37 | length 2056.8
  SIGNAL w5.1: U10.37@2032.79,2857.98 2041.67,2866.86 2041.67,2870.82 2110.12,2939.27 cw(c2121.53,2927.87) 2121.53,2944 3135.32,2944 cw(c3135.32,2844) 3206.03,2914.71 3220.28,2900.46 cw(c3149.57,2829.75) 3245.06,2859.44 cw(c3149.57,2829.75) 3249.57,2829.75 3249.57,2366.22 ccw(c3317.33,2366.22) 3269.35,2318.36 ccw(c3317.33,2366.22) 3269.41,2318.3 cw(c3219.5,2268.39) 3290.09,2268.39 3290.09,2204.58 ccw(c3326.75,2204.58) 3300.81,2178.67 ; 3300.83,2178.65 3307.73,2171.75 ccw(c3317.23,2181.25) 3317.23,2167.82 3319.03,2167.82 cw(c3319.03,2158.73) 3325.44,2165.17 3326.08,2164.53 ccw(c3331,2169.45) v1(3331,2162.49)
  SIGNAL (Bottom) w5.1: v1(3331,2162.49) ccw(c3331,2169.45) 3335.92,2164.53 3336.54,2165.15 cw(c3342.97,2158.73) 3342.97,2167.82 3343.1,2167.81 cw(c3342.88,2162.72) 3346.64,2166.16 ccw(c3354.38,2173.24) 3352.1,2163.01 cw(c3350.99,2158.03) 3355.9,2159.41 3355.9,2159.68 ccw(c3358.09,2159.68) 3356.54,2158.14 ccw(c3358.09,2159.68) 3358.09,2157.5 U7.15@3364.22,2157.5
IN_CC1: J4.A5 U9.1 | length 1426.7
  SIGNAL w5.1: J4.A5@3417.35,2757.53 3418.14,2758.33 3444.2,2758.33 v1(3445,2759.12)
  PWR w5.1: v1(2423.34,2823.26) cw(c2444.93,2823.26) 2424.74,2830.92 cw(c2444.93,2823.26) 2429.66,2838.53 2430.95,2839.82 ccw(c2415.97,2854.79) 2437.15,2854.79 2437.15,2883.44 cw(c2494.71,2883.44) 2454.01,2924.14 cw(c2494.71,2883.44) 2494.71,2941 3426.74,2941 cw(c3426.74,2877.3) 3471.76,2922.37 ; v1(3445,2759.12) 3454.13,2759.12 ccw(c3454.13,2781.15) 3469.71,2765.58 3489.35,2785.22 ccw(c3441.92,2832.65) 3509,2832.65 3509,2858.89 ccw(c3445.66,2858.89) 3490.47,2903.66 ; 3471.79,2922.34 3490.45,2903.68
  SIGNAL (Bottom) w5.1: U9.1@2379.93,2796.86 ccw(c2379.93,2820.62) 2396.73,2803.82 2411.11,2818.2 cw(c2423.34,2805.97) 2415.52,2821.4 cw(c2423.34,2805.97) v1(2423.34,2823.26)
IN_CC2: J4.B5 U9.28 | length 1642.6
  SIGNAL w5.1: v1(3333.01,2696.06) 3334.22,2697.27 3359.45,2697.27 J4.B5@3360.66,2698.47
  PWR w5.1: v1(2357.67,2817.21) 2380.85,2817.21 ccw(c2380.85,2852.51) 2405.8,2827.54 2416.15,2837.89 ccw(c2387.43,2866.61) 2428.05,2866.61 2428.05,2883.44 cw(c2494.71,2883.44) 2432.75,2908.03 2437.81,2920.81 2447.58,2930.58 ; v1(3333.01,2696.06) 3430.97,2696.06 ccw(c3430.97,2730.53) 3455.35,2706.16 3455.91,2706.72 ; 3455.92,2706.74 ccw(c3445,2717.63) 3456.78,2707.66 3457.29,2708.27 ccw(c3430.97,2730.53) 3465.44,2730.53 cw(c3508.68,2730.53) 3478.11,2761.1 3498.1,2781.1 3500.21,2783.61 ccw(c3441.92,2832.65) 3518.1,2832.65 3518.1,2860.78 ccw(c3450.21,2860.78) 3498.21,2908.79 3477.56,2929.44 3476.98,2929.99 ccw(c3426.74,2877.3) 3426.74,2950.1 2494.71,2950.1 ccw(c2494.71,2883.44) 2447.61,2930.61 ; 2447.61,2930.61 ccw(c2494.71,2883.44) 2447.58,2930.58
  SIGNAL (Bottom) w5.1: U9.28@2336.63,2812.62 2336.63,2815.83 2338.02,2817.21 v1(2357.67,2817.21)
IN_SSRX1_N: J4.B11 U9.7 U11.2 U11.9 | length 1369.2
  SIGNAL w5.1: v1(3293,2770) 3301.7,2772.19 ccw(c3300.46,2777.14) 3304.06,2773.53 ; 3304.09,2773.56 3320.55,2790.02 ; 3320.56,2790.03 ccw(c3316.92,2793.61) 3321.23,2790.88 3325.58,2797.75 cw(c3338.42,2789.62) 3327.38,2800.07 ; 3327.41,2800.1 ccw(c3304.36,2822.49) 3330.81,2804.24 3334.5,2809.59 cw(c3338.7,2806.69) 3338.7,2811.79 ccw(c3338.7,2819.97) 3344.48,2814.18 cw(c3350.26,2808.4) 3350.26,2816.58 J4.B11@3360.66,2816.58
  SIGNAL (Bottom) w5.1: U9.7@2379.93,2702.37 2387.78,2702.37 ccw(c2387.78,2707.19) 2391.19,2703.78 cw(c2394.6,2700.37) 2394.6,2705.2 2415.2,2705.2 cw(c2415.2,2655.45) 2450.37,2690.63 ; 2450.38,2690.63 2465.56,2675.44 2507.15,2633.85 ccw(c2570.82,2697.51) 2570.82,2607.48 3150.78,2607.48 cw(c3150.78,2597.28) 3157.99,2604.49 3157.99,2604.07 3158.68,2603.38 ccw(c3160.36,2605.05) 3160.36,2602.68 U11.9@3166.56,2602.68 3171.79,2602.68 ccw(c3171.79,2607.42) 3175.13,2604.07 3175.14,2604.49 3176.63,2605.98 cw(c3180.24,2602.38) 3180.24,2607.48 3183.65,2607.48 cw(c3183.65,2597.28) 3190.86,2604.49 3190.86,2604.07 3191.56,2603.38 ccw(c3193.23,2605.05) 3193.23,2602.68 U11.2@3199.44,2602.68 3204.66,2602.68 ccw(c3204.66,2607.42) 3208,2604.07 3208.01,2604.49 3209.5,2605.98 cw(c3213.11,2602.38) 3213.11,2607.48 3228.82,2607.48 cw(c3228.82,2569.56) 3255.62,2596.38 ; 3255.66,2596.34 ccw(c3295.39,2636.14) 3295.39,2579.9 3320.7,2579.9 ccw(c3320.7,2629.36) 3355.67,2594.39 3355.82,2594.53 ccw(c3320.82,2629.52) 3370.31,2629.03 ccw(c3320.82,2629.52) 3370.31,2629.52 3370.31,2737.91 ccw(c3331.77,2737.91) 3359.02,2765.16 3350.57,2773.61 ; v1(3293,2770) cw(c3297.92,2765.08) 3297.92,2772.04 ccw(c3297.92,2783.26) 3305.85,2775.32 3305.9,2775.37 cw(c3322.1,2759.17) 3305.94,2775.41 cw(c3322.1,2759.17) 3322.1,2782.08 3330.11,2782.08 cw(c3330.11,2753.15) 3350.57,2773.61
IN_SSRX1_P: J4.B10 U9.6 U11.1 U11.10 | length 1368.1
  SIGNAL w5.1: v1(3307.67,2755.33) 3309.87,2764.03 cw(c3314.81,2762.79) 3311.21,2766.39 3327.71,2782.89 ccw(c3316.92,2793.61) 3329.77,2785.48 3334.12,2792.35 cw(c3338.42,2789.62) 3334.7,2793.1 ; 3334.73,2793.14 ccw(c3304.36,2822.49) 3338.34,2797.41 cw(c3342.43,2794.36) 3342.43,2799.46 3343.52,2799.46 J4.B10@3344.13,2799.65
  SIGNAL (Bottom) w5.1: U9.6@2379.93,2718.12 2387.78,2718.12 cw(c2387.78,2713.3) 2391.19,2716.71 ccw(c2394.6,2720.12) 2394.6,2715.3 2419.38,2715.3 cw(c2419.38,2665.55) 2454.56,2700.73 2511.34,2643.95 ccw(c2575,2707.61) 2575,2617.58 2660,2617.58 2675,2617.58 2685,2627.58 2700,2627.58 2710,2617.58 2725,2617.58 2735,2627.58 2750,2627.58 2760,2617.58 2775,2617.58 2785,2627.58 2800,2627.58 2810,2617.58 2825,2617.58 2835,2627.58 2850,2627.58 2860,2617.58 2875,2617.58 2885,2627.58 2900,2627.58 2910,2617.58 2925,2617.58 2935,2627.58 2950,2627.58 2960,2617.58 2975,2617.58 2985,2627.58 3000,2627.58 3010,2617.58 3025,2617.58 3035,2627.58 3050,2627.58 3060,2617.58 3122,2617.58 3150.78,2617.58 ccw(c3150.78,2627.78) 3157.99,2620.56 3157.99,2620.98 3158.68,2621.68 cw(c3160.36,2620) 3160.36,2622.37 U11.10@3166.56,2622.37 3171.79,2622.37 cw(c3171.79,2617.63) 3175.13,2620.99 3175.14,2620.57 3176.63,2619.07 ccw(c3180.24,2622.68) 3180.24,2617.58 3183.65,2617.58 ccw(c3183.65,2627.78) 3190.86,2620.56 3190.86,2620.98 3191.56,2621.68 cw(c3193.23,2620) 3193.23,2622.37 U11.1@3199.44,2622.37 3204.66,2622.37 cw(c3204.66,2617.63) 3208,2620.99 3208.01,2620.57 3209.5,2619.07 ccw(c3213.11,2622.68) 3213.11,2617.58 3228.95,2617.58 cw(c3228.95,2569.88) 3262.68,2603.61 ccw(c3295.53,2636.46) 3295.53,2590 3320.59,2590 ccw(c3320.59,2629.62) 3348.58,2601.58 ccw(c3320.59,2629.62) 3360.21,2629.62 3360.21,2737.86 ccw(c3331.65,2737.86) 3351.85,2758.05 3343.48,2766.42 ccw(c3330.04,2752.98) 3330.04,2771.98 3322.17,2771.98 ccw(c3322.17,2759) 3313,2768.18 ccw(c3320.93,2760.25) 3309.71,2760.25 cw(c3302.75,2760.25) v1(3307.67,2755.33)
IN_SSRX2_N: J4.A10 U9.8 U11.4 U11.7 | length 1344.5
  SIGNAL w5.1: J4.A10@3417.35,2659.1 3427.74,2659.1 cw(c3427.74,2650.92) 3433.52,2656.71 3434.48,2656.54 3435.57,2656.54 ccw(c3435.57,2661.64) 3439.65,2658.58 cw(c3473.65,2633.51) 3443.25,2662.85 3443.55,2663.15 ccw(c3439.88,2666.69) 3443.65,2663.26 ; 3443.67,2663.28 3454.16,2675.12 3457.84,2679.27 cw(c3469.21,2669.19) 3458.47,2679.94 ccw(c3454.86,2683.54) 3459.81,2682.3 v1(3462,2691)
  SIGNAL (Bottom) w5.1: U9.8@2379.93,2686.63 2387.78,2686.63 cw(c2387.78,2681.81) 2391.19,2685.22 ccw(c2394.6,2688.63) 2394.6,2683.8 2404.87,2683.8 cw(c2404.87,2656.47) 2424.2,2675.8 2517.9,2582.1 ccw(c2574.82,2639.02) 2574.82,2558.52 2919,2558.52 2934,2558.52 2944,2568.52 2959,2568.52 2969,2558.52 2984,2558.52 2994,2568.52 3009,2568.52 3019,2558.52 3058,2558.52 3150.78,2558.52 ccw(c3150.78,2568.72) 3157.99,2561.51 3157.99,2561.93 3158.68,2562.62 cw(c3160.36,2560.95) 3160.36,2563.32 U11.7@3166.56,2563.32 3171.79,2563.32 cw(c3171.79,2558.58) 3175.13,2561.93 3175.14,2561.51 3176.63,2560.02 ccw(c3180.24,2563.62) 3180.24,2558.52 3183.65,2558.52 ccw(c3183.65,2568.72) 3190.86,2561.51 3190.86,2561.93 3191.56,2562.62 cw(c3193.23,2560.95) 3193.23,2563.32 U11.4@3199.44,2563.32 3205.64,2563.32 cw(c3205.64,2560.95) 3207.32,2562.62 3208.01,2561.93 3208.01,2561.51 ccw(c3215.22,2568.72) 3215.22,2558.52 3215.85,2558.52 cw(c3215.85,2529.77) 3236.18,2550.1 3249.43,2536.85 ccw(c3273.21,2560.63) 3273.21,2527 3370.32,2527 ccw(c3370.32,2585.91) 3411.97,2544.25 ; 3411.99,2544.28 ccw(c3384.6,2571.62) 3423.31,2571.62 3423.31,2616.89 cw(c3490.62,2616.89) 3443.02,2664.49 3457.3,2678.77 ; 3457.31,2678.78 ccw(c3450.87,2685.2) 3459.96,2685.2 3459.96,2686.08 cw(c3466.92,2686.08) v1(3462,2691)
IN_SSRX2_P: J4.A11 U9.9 U11.5 U11.6 | length 1346.8
  SIGNAL w5.1: J4.A11@3417.35,2639.42 3427.74,2639.42 ccw(c3427.74,2647.6) 3433.52,2641.81 cw(c3439.3,2636.03) 3439.3,2644.21 ccw(c3439.3,2649.31) 3443.5,2646.41 3447.22,2651.8 cw(c3473.65,2633.51) 3450.55,2655.86 3450.81,2656.14 ccw(c3439.88,2666.69) 3451.23,2656.58 3462.2,2668.96 3464.74,2671.83 3465.4,2672.57 cw(c3469.21,2669.19) 3467.97,2674.13 v1(3476.67,2676.33)
  SIGNAL (Bottom) w5.1: U9.9@2379.93,2670.88 2387.78,2670.88 ccw(c2387.78,2675.7) 2391.19,2672.29 cw(c2394.6,2668.88) 2394.6,2673.7 2404.79,2673.7 cw(c2404.79,2656.27) 2417.11,2668.61 2510.76,2574.96 ccw(c2574.82,2639.02) 2510.85,2574.87 ccw(c2574.82,2639.02) 2574.69,2548.42 ccw(c2574.82,2639.02) 2574.82,2548.42 3150.78,2548.42 cw(c3150.78,2538.22) 3157.99,2545.44 3157.99,2545.02 3158.68,2544.32 ccw(c3160.36,2546) 3160.36,2543.63 U11.6@3166.56,2543.63 3171.79,2543.63 ccw(c3171.79,2548.37) 3175.13,2545.01 3175.14,2545.43 3176.63,2546.93 cw(c3180.24,2543.32) 3180.24,2548.42 3183.65,2548.42 cw(c3183.65,2538.22) 3190.86,2545.44 3190.86,2545.02 3191.56,2544.32 ccw(c3193.23,2546) 3193.23,2543.63 U11.5@3199.44,2543.63 3205.64,2543.63 ccw(c3205.64,2546) 3207.32,2544.32 3208.01,2545.02 3208.01,2545.43 cw(c3215.22,2538.22) 3215.22,2548.42 cw(c3215.22,2528.25) 3229.47,2542.53 ; 3229.49,2542.51 3242.36,2529.64 ccw(c3273.12,2560.41) 3273.12,2516.9 3374.5,2516.9 ccw(c3374.5,2575.81) 3416.15,2534.15 3419.19,2537.19 ccw(c3384.85,2571.52) 3433.41,2571.52 3433.41,2616.77 cw(c3490.93,2616.77) 3450.23,2657.42 ; 3450.26,2657.44 3464.44,2671.63 cw(c3470.87,2665.2) 3470.87,2674.29 3471.75,2674.29 ccw(c3471.75,2681.25) v1(3476.67,2676.33)